# EAGLE board speakerboard (EAGLE 8.0.1)
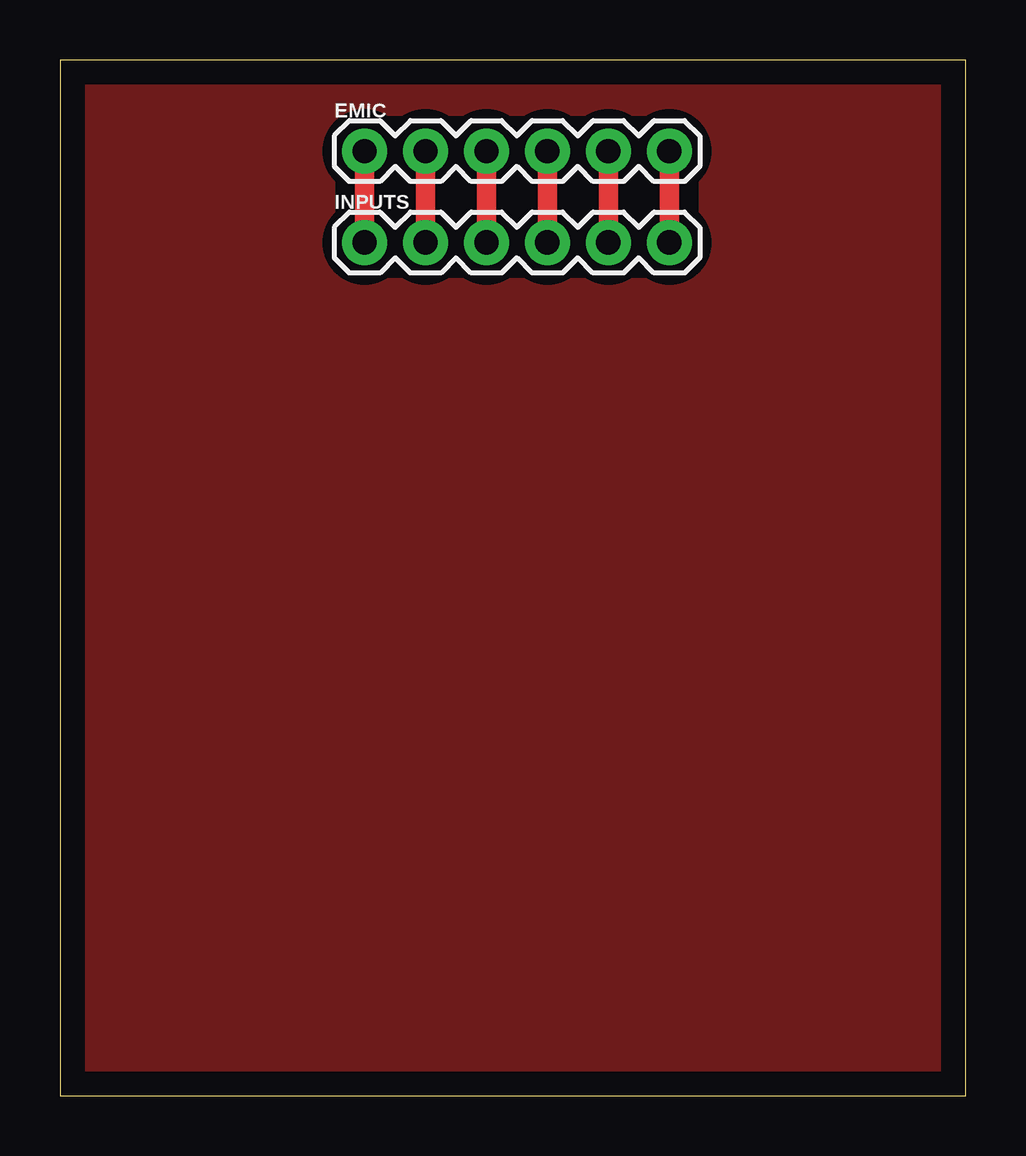
[diagram p0: board, top side]

Size 37.77 x 43.17 mm. Coordinates in mm from the lower left corner, seen from the top.
Outline: 0,0 37.77,0 37.77,43.17 0,43.17 0,0
Copper layers (1*16): Top 0.035mm / dielectric 1.5mm / Bottom 0.035mm
Design rules "default": minimum track width 10mil, minimum drill 24mil, track to track 8mil, track to pad 8mil, pad to pad 8mil, via to via 8mil, smd to smd 8mil, copper to edge 40mil, drill to drill 8mil, minimum pad ring 10mil, minimum via ring 8mil, stop-mask expansion 4mil, vias tented up to drill 0mil, thermal gap 10mil

## Footprints (pad centres in the part's own frame; a part is rotated, then mirrored left to right if it is on the bottom)
1X06 = drill 1.016 pad 1.88: 1 0,0; 2 2.54,0; 3 5.08,0; 4 7.62,0; 5 10.16,0; 6 12.7,0

## Placement (x,y rotation side)
EMIC  [1X06]  12.7,39.37 0 top
INPUTS  [1X06]  12.7,35.56 0 top

## Library data of the parts
EMIC INPUTS = SparkFun-Connectors; PROD_ID: CONN-08437

## Nets
N$1: EMIC.6 INPUTS.6
N$2: EMIC.5 INPUTS.5
N$3: EMIC.4 INPUTS.4
N$4: EMIC.3 INPUTS.3
N$5: EMIC.2 INPUTS.2
N$6: EMIC.1 INPUTS.1

## Tracks (layer width: path | path; a pad name or v marks a point on that pad's centre or on a via)
N$1
  Top 0.813: EMIC.6 INPUTS.6
N$2
  Top 0.813: EMIC.5 INPUTS.5
N$3
  Top 0.813: EMIC.4 INPUTS.4
N$4
  Top 0.813: EMIC.3 INPUTS.3
N$5
  Top 0.813: EMIC.2 INPUTS.2
N$6
  Top 0.813: EMIC.1 INPUTS.1
N$7
  pour Top (isolate 0.813): 38.1,43.18 0,43.18 0,0 38.1,0